# Altium PCB Science_Board_PCB.PcbDoc (part 1 of 2)
Units mil, origin at the board's own origin, x right, y up, seen from the top; angles counter-clockwise.
Board outline 6000 x 3000 mil, 4 copper layers (Top Layer, Mid Layer 1, Mid Layer 2, Bottom Layer), stack 78.937 mil thick; 225 components, 114 nets, 687 pads, 119 vias.
Unrouted connection lines stored in the file: 2.
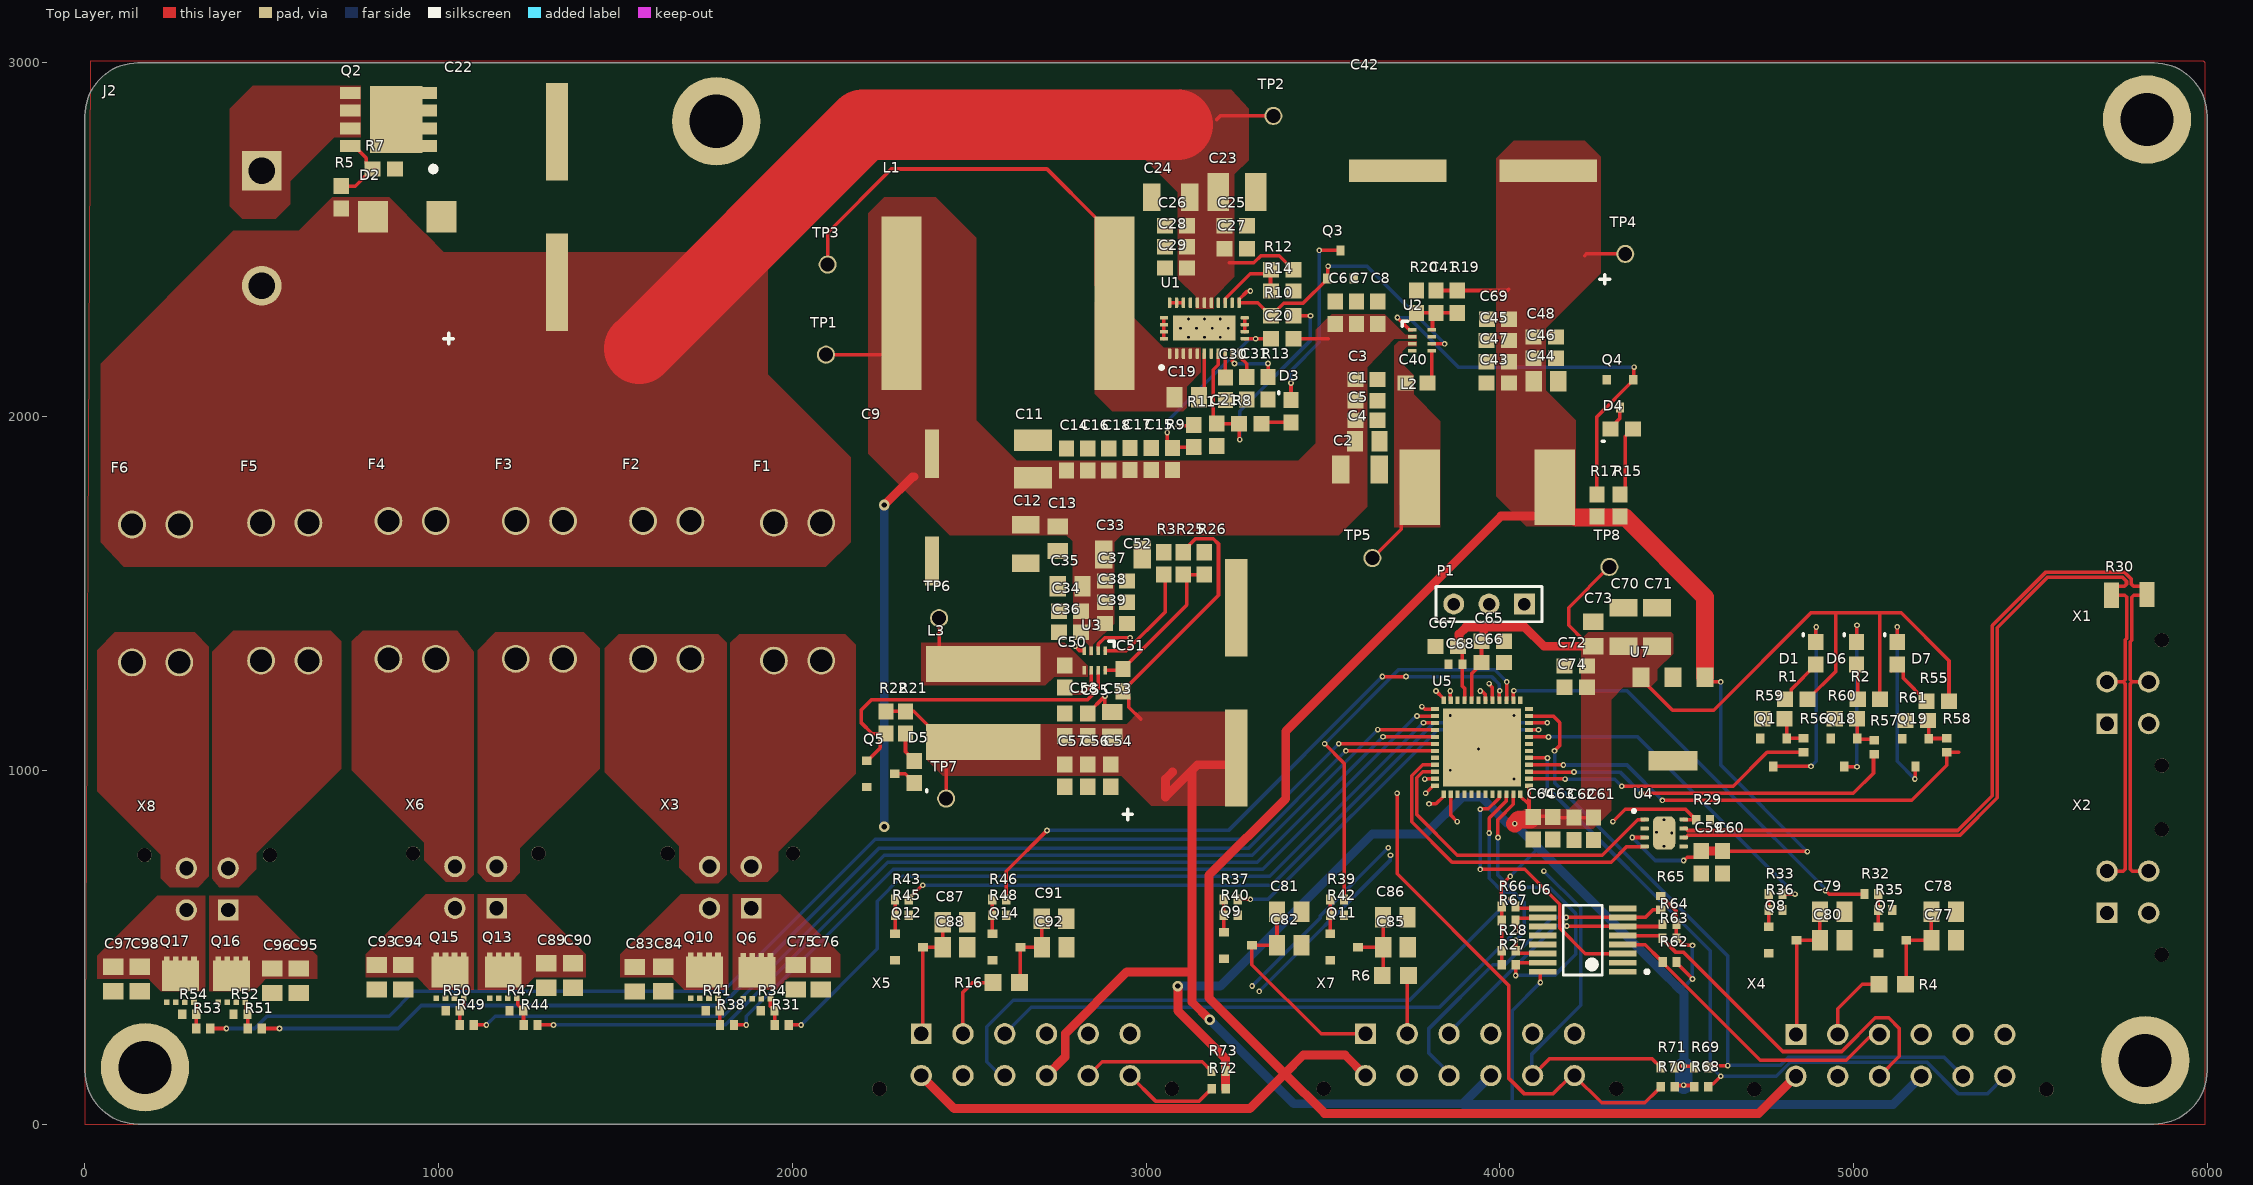
[diagram p0: Top Layer view]
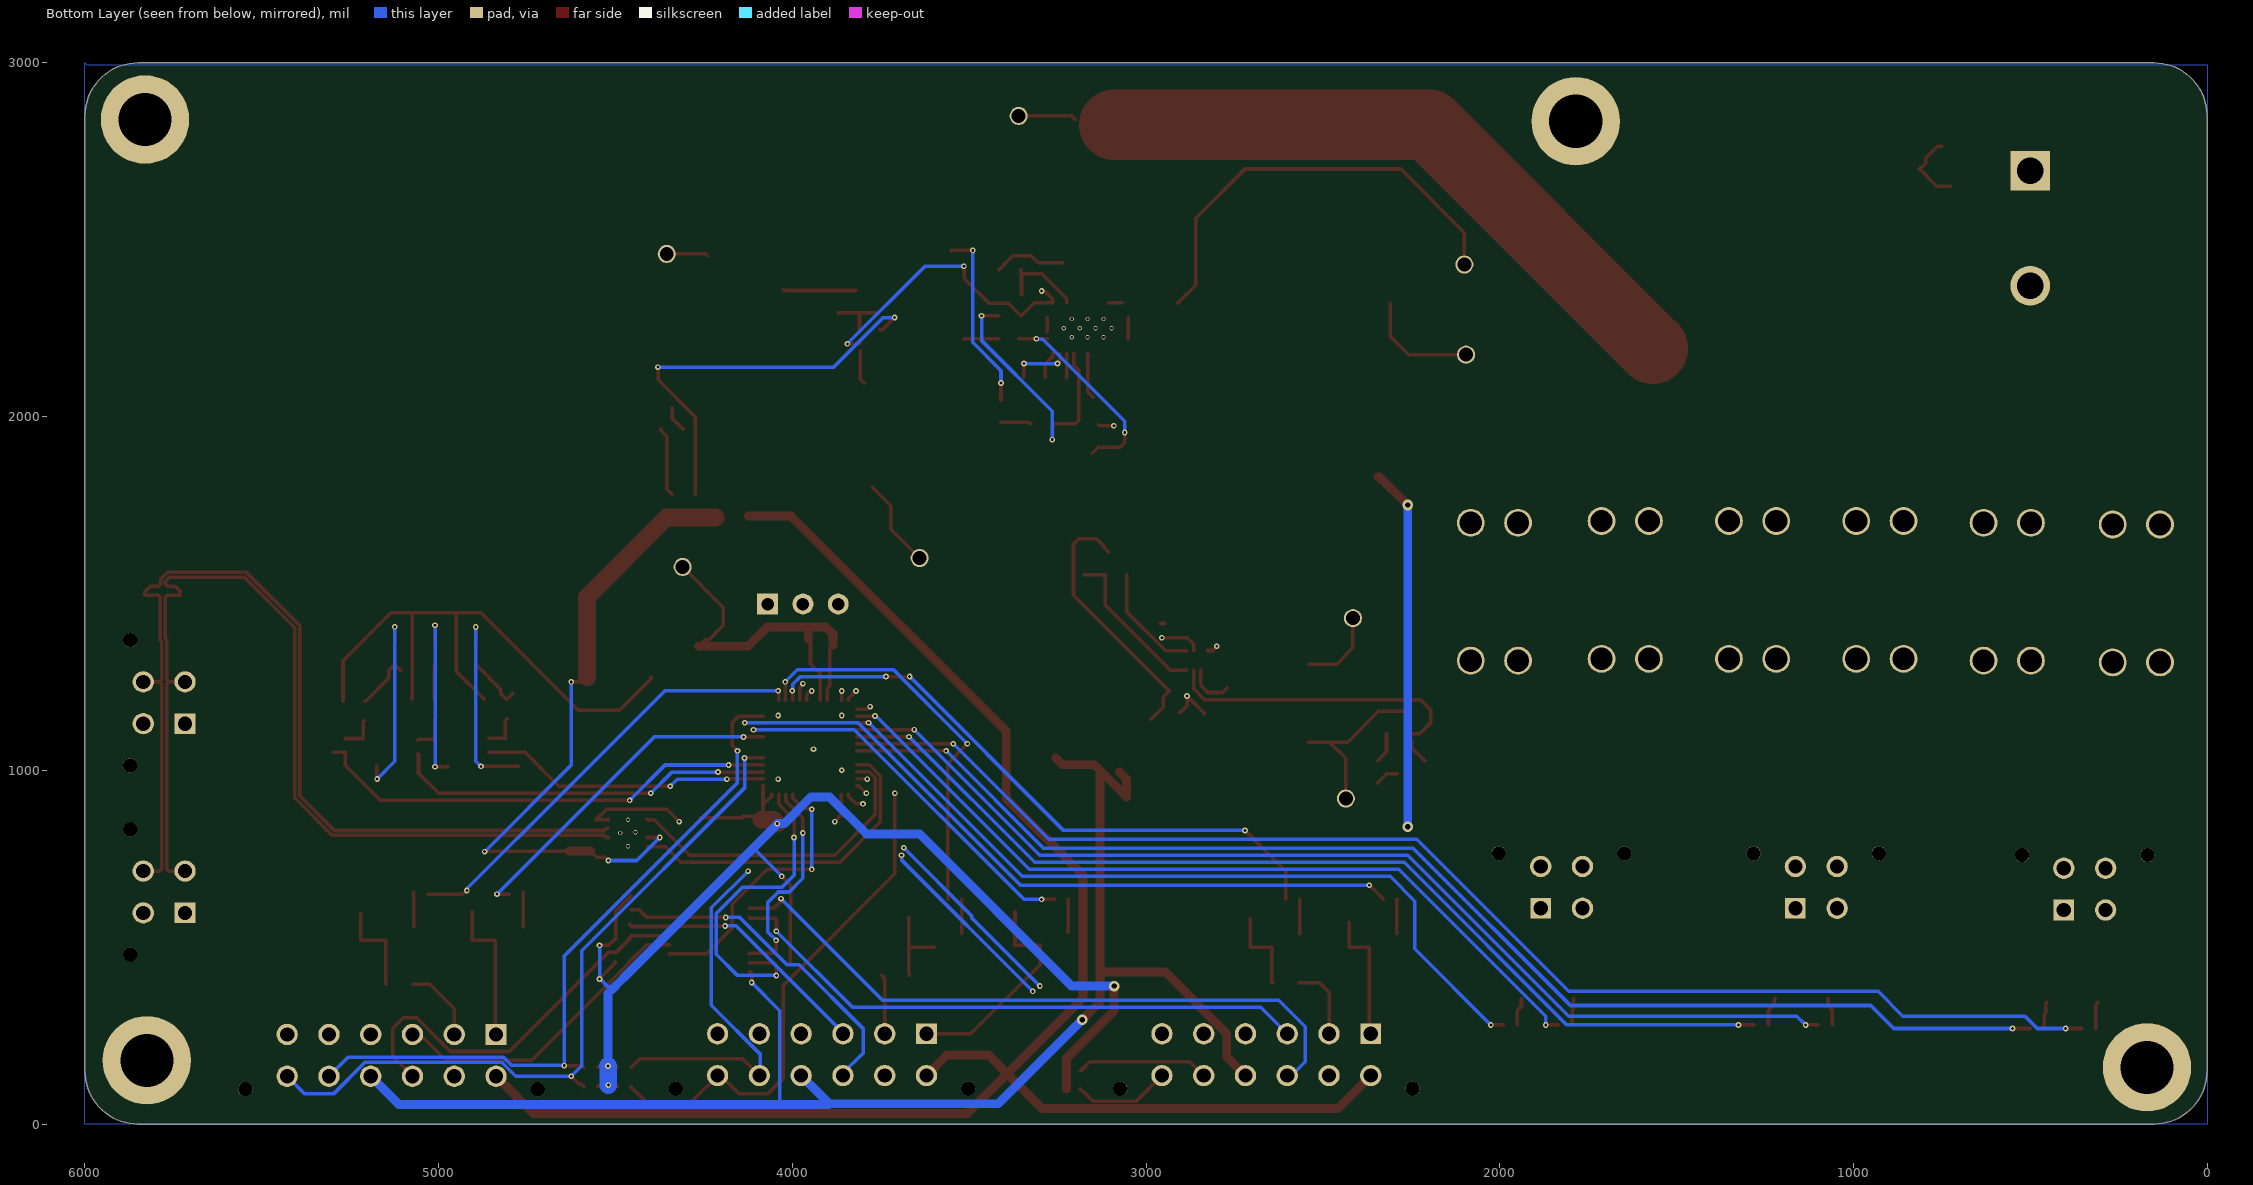
[diagram p1: Bottom Layer view, seen from below]
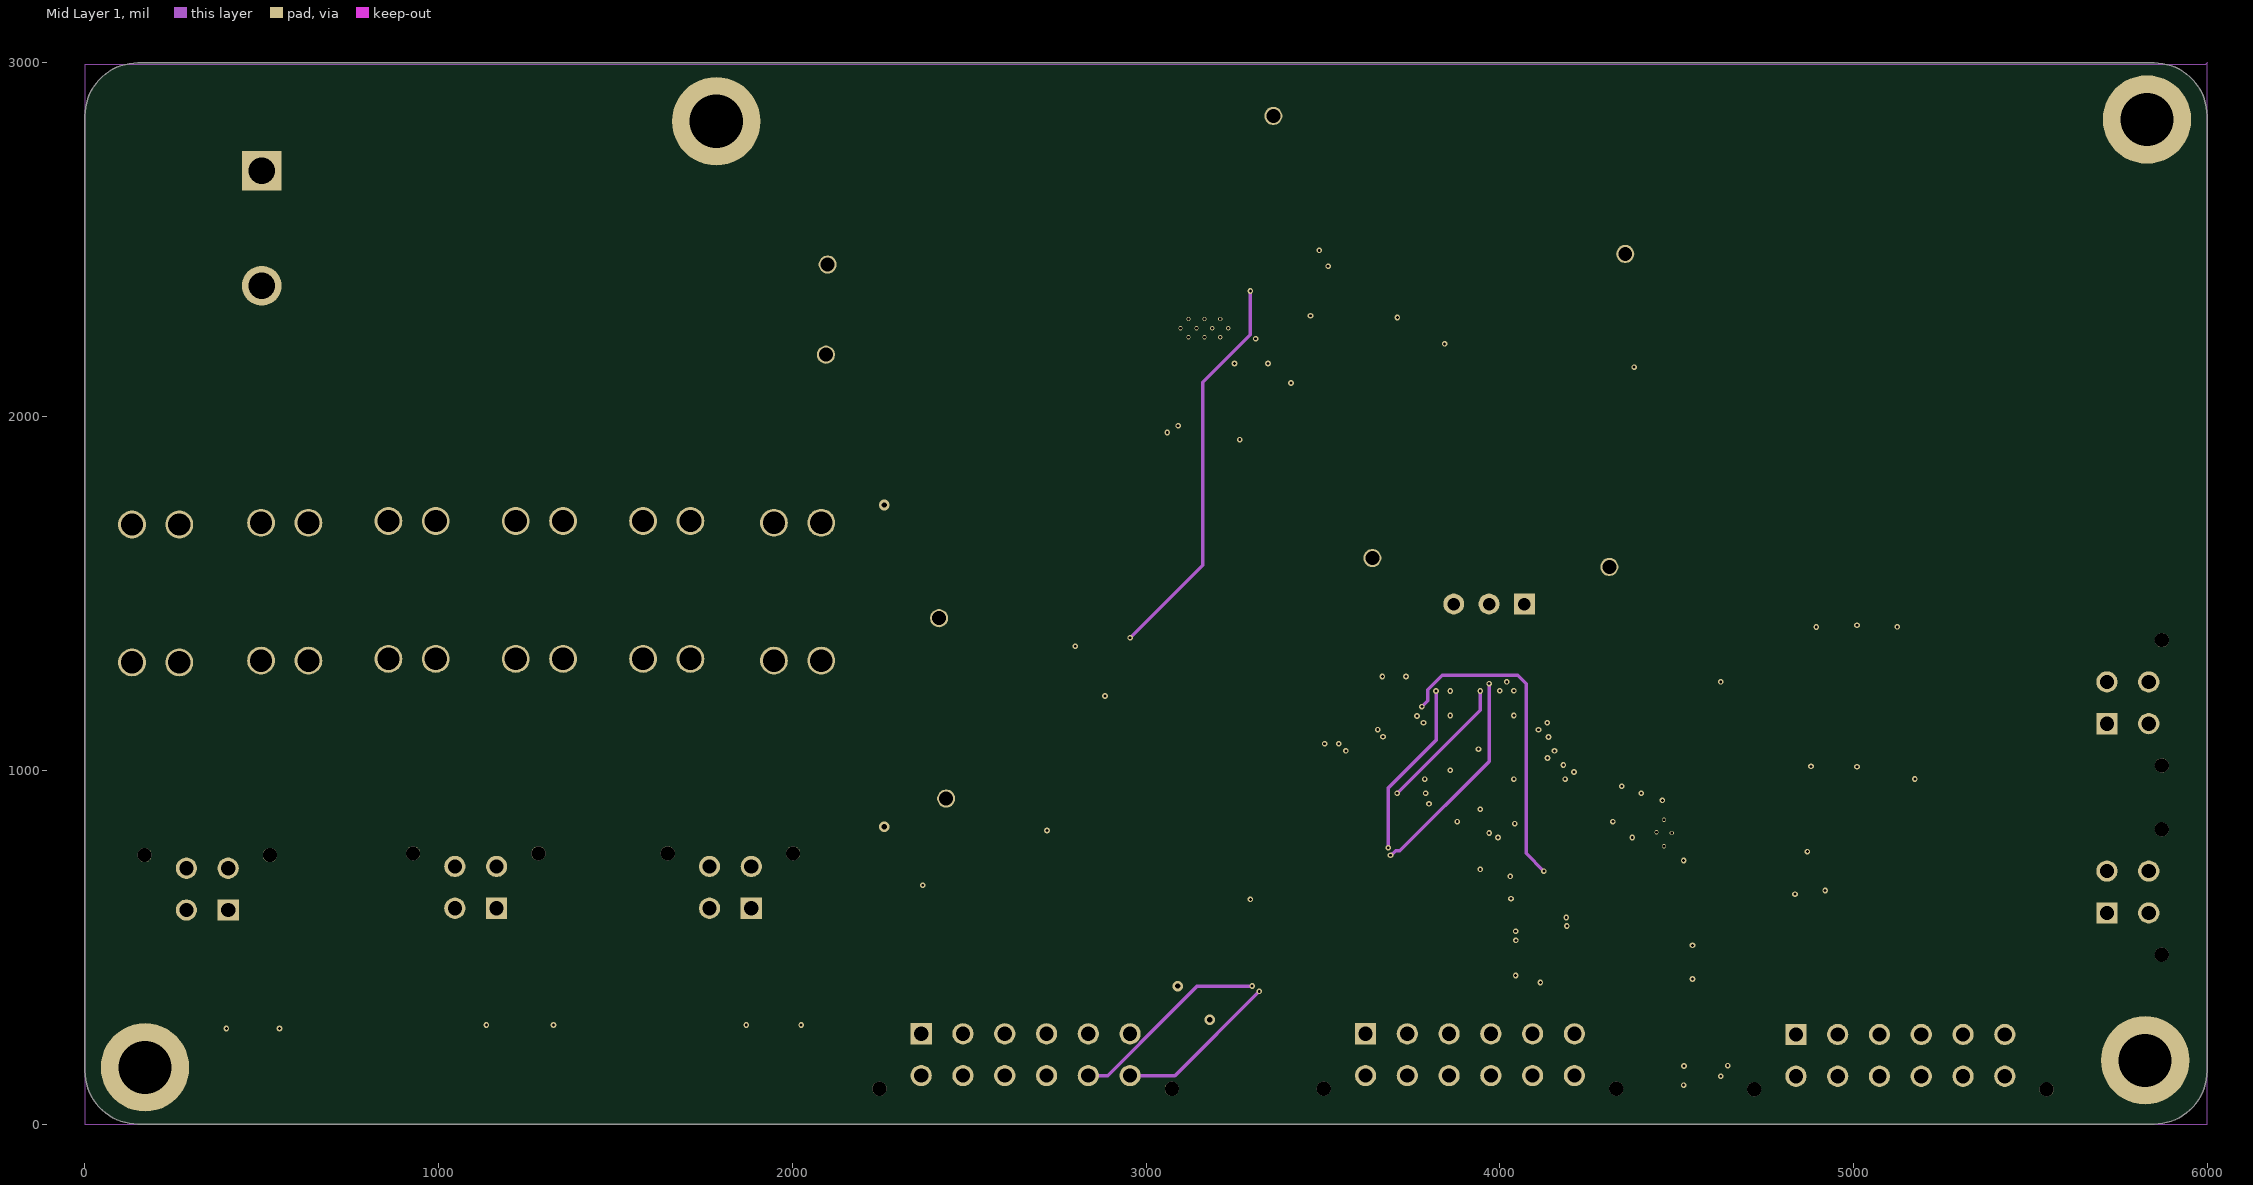
[diagram p2: Mid Layer 1]
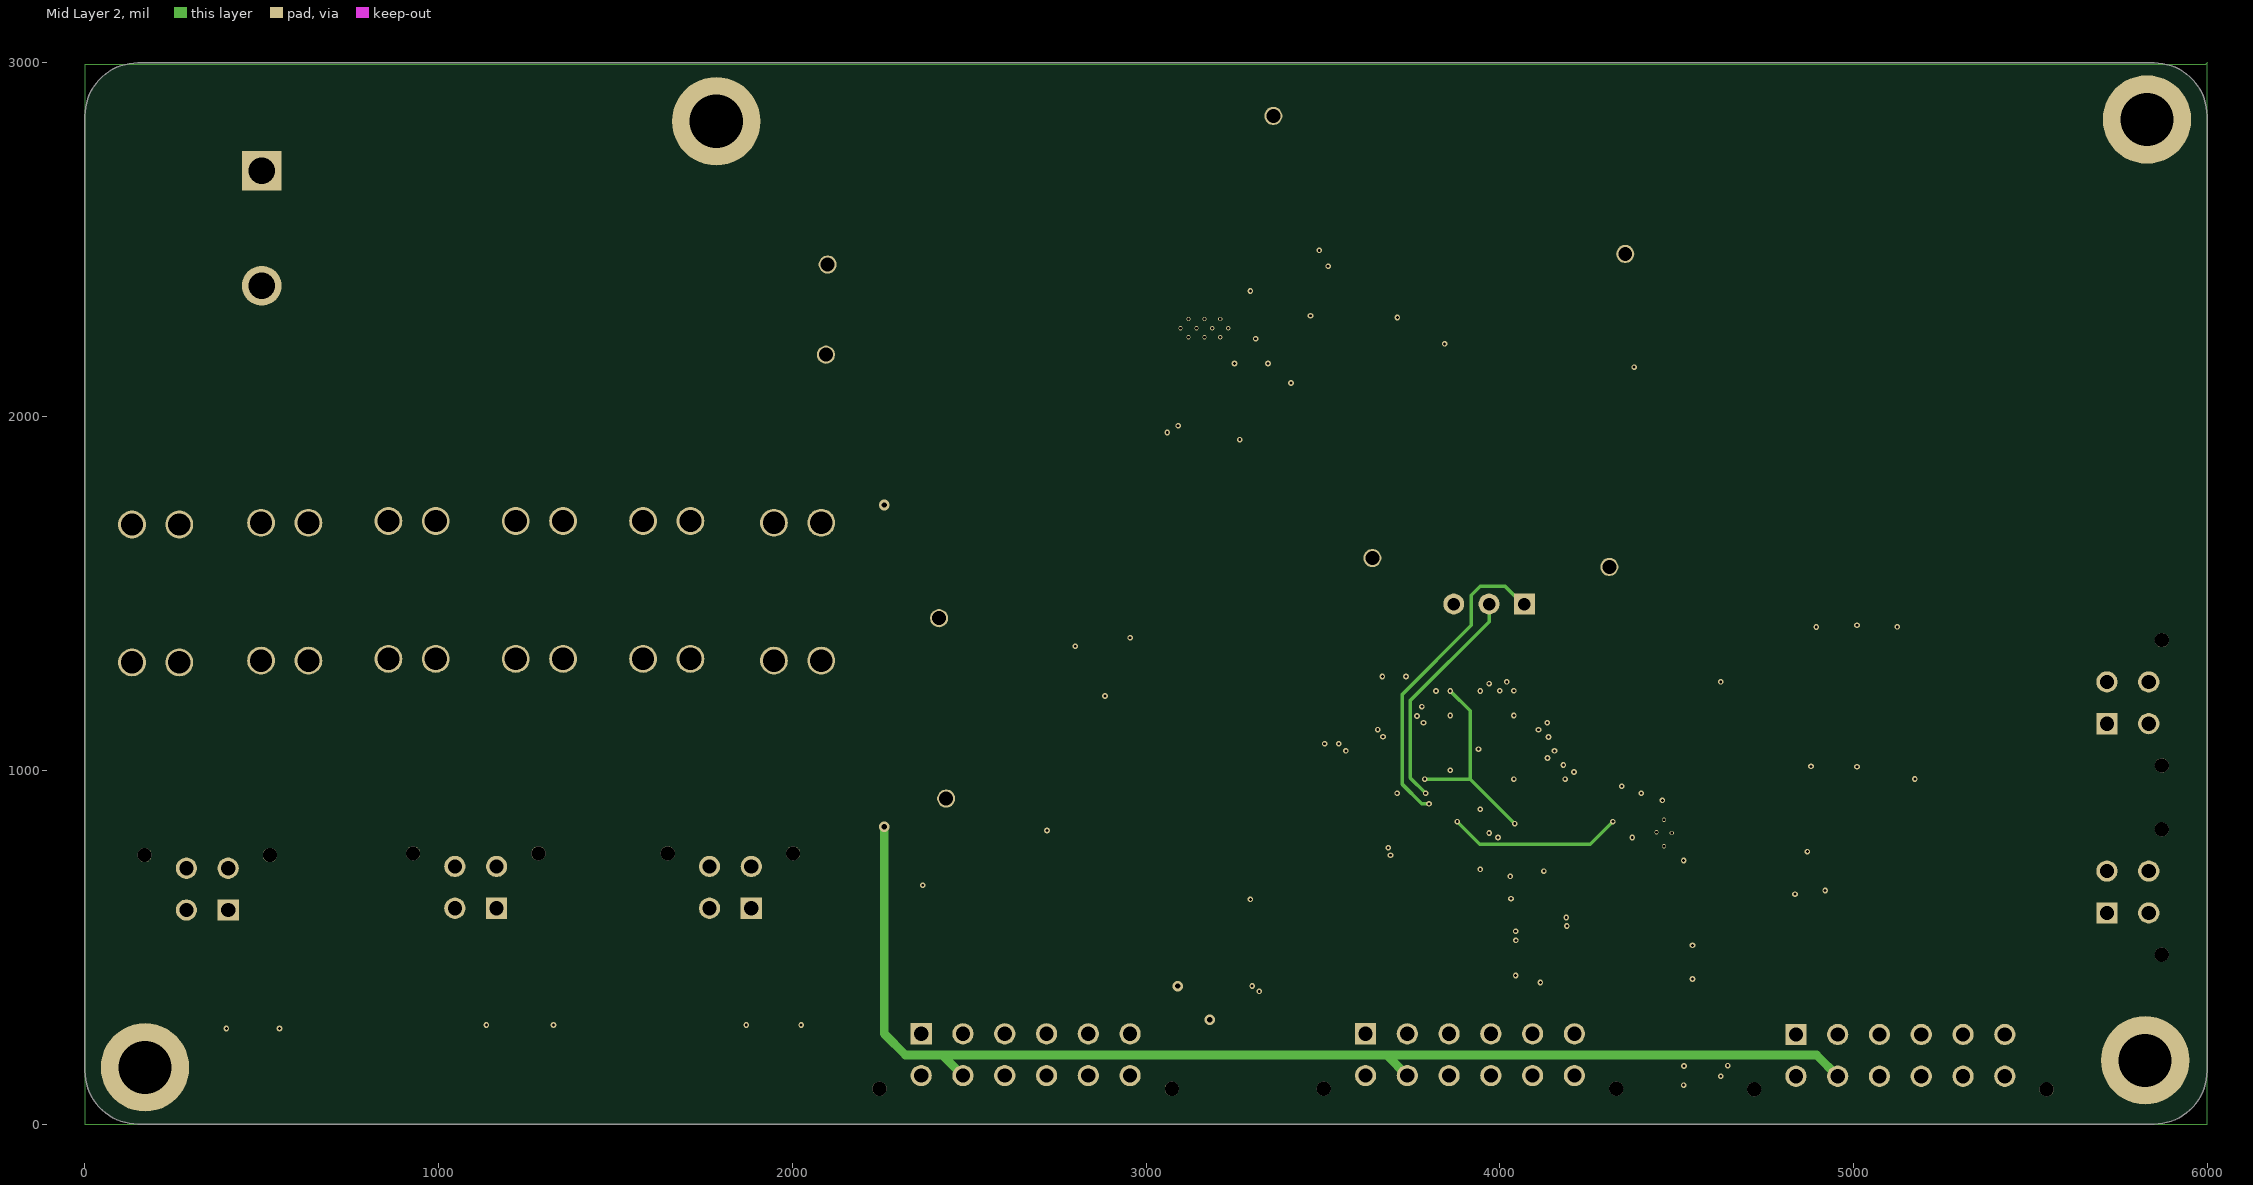
[diagram p3: Mid Layer 2]

## Layer stack, top to bottom
Top Solder: solder mask 0.5, Solder Resist, Dk 3.8
Top Layer: signal copper 1.378
Dielectric 1: prepreg 7.874, 7628, Dk 4.6
Mid Layer 1: signal copper 1.378
Core: core 57.6772, FR-4, Dk 4.5
Mid Layer 2: signal copper 1.378
Dielectric 2: prepreg 7.874, 7628, Dk 4.6
Bottom Layer: signal copper 1.378
Bottom Solder: solder mask 0.5, Solder Resist, Dk 3.8

## Board outline
0,150 0,2850 cw(c150,2850) 150,3000 5850,3000 cw(c5850,2850) 6000,2850 6000,150 cw(c5850,150) 5850,0 150,0 cw(c150,150)

## Design rules (kind name [scope] priority, off if disabled: settings)
BoardOutlineClearance [All] p1: gap=7.87 ignorepadtopadclearanceinfootprint=FALSE
Clearance [All] p1: gap=4 ignorepadtopadclearanceinfootprint=FALSE except(5: Arc-Via Track-Via SMDPad-Via THPad-Via Via-Via Via-Fill Via-Poly Via-Region Via-Text; 9.84: Arc-Hole Track-Hole SMDPad-Hole THPad-Hole Via-Hole Fill-Hole Poly-Hole Region-Hole Text-Hole)
ComponentClearance [All] p1: gap=4 collisioncheckmode=3 verticalgap=4 showdistances=TRUE
DiffPairsRouting [All] p1: maxlimit=4 minlimit=4 mostfreqgap=4 toplayer_minwidth=4 toplayer_maxwidth=71497.94 toplayer_prefwidth=4 midlayer1_minwidth=4 midlayer1_maxwidth=71497.94 midlayer1_prefwidth=4 midlayer2_minwidth=4 midlayer2_maxwidth=71497.94 midlayer2_prefwidth=4 bottomlayer_minwidth=4 bottomlayer_maxwidth=71497.94 bottomlayer_prefwidth=4 maxuncoupledlength=500
Height [All] p1: minheight=0 maxheight=71497.94 prefheight=500
HoleSize [All] p1: absolutevalues=TRUE maxlimit=248.03 minlimit=7.87 maxpercent=80.000 minpercent=20.000
HoleToHoleClearance [All] p1: gap=9.84 allowstackedmicrovias=FALSE
MinimumAnnularRing [All] p1: minimumring=3
MinimumSolderMaskSliver [All] p1: minsoldermaskwidth=0
PlaneClearance [All] p1: clearance=4
PlaneConnect PlaneConnectPowerPads [InPadClass('PowerPads')] p1: planeconnectstyle=Direct reliefexpansion=20 reliefentries=4 reliefconductorwidth=10 reliefairgap=10
PlaneConnect [All] p2: pad.planeconnectstyle=Relief pad.reliefexpansion=11.81 pad.reliefentries=4 pad.reliefconductorwidth=4 pad.reliefairgap=4 via.planeconnectstyle=Direct via.reliefexpansion=11.81 via.reliefentries=4 via.reliefconductorwidth=5 via.reliefairgap=5
PolygonConnect PolygonConnectPowerPads [All vs (InPadClass('PowerPads'))] p1: connectstyle=Direct reliefconductorwidth=10 reliefentries=4 polygonreliefangle="90 Angle" airgapwidth=10
PolygonConnect [All] p2: connectstyle=Direct reliefconductorwidth=4 reliefentries=4 polygonreliefangle="90 Angle" airgapwidth=4
RoutingVias [All] p1: holewidth=7.87 width=17.72 viastyle="Through Hole" minholewidth=7.87 minwidth=17.72 maxholewidth=248.03 maxwidth=257.87
SilkToSilkClearance [All] p1: silktosilkclearance=0
SilkToSolderMaskClearance [IsPad] p1: minsilkscreentomaskgap=4 clearancetoexposedcopper=TRUE
SolderMaskExpansion [All] p1: expansion=2.95 istentingtop=FALSE
Width [All] p1: maxlimit=71497.94 minlimit=4 preferedwidth=4
20 further rules are at their usual default settings.

## Classes and differential pairs
component class MOSFETS: C75 C76 C77 C78 C79 C80 C81 C82 C83 C84 C85 C86 C87 C88 C89 C90 C91 C92 C93 C94 C95 C96 C97 C98 F1 F2 F3 F4 F5 F6 Q6 Q7 Q8 Q9 Q10 Q11 Q12 Q13 Q14 Q15 Q16 Q17 R4 R6 R16 R31 R32 R33 R34 R35 R36 R37 R38 R39 R40 R41 R42 R43 R44 R45 R46 R47 R48 R49 R50 R51 R52 R53 R54 X3 X4 X5 X6 X7 X8
component class MCU_Sensors_CAN: C59 C60 C61 C62 C63 C64 C65 C66 C67 C68 D1 D6 D7 P1 Q1 Q18 Q19 R1 R2 R27 R28 R29 R30 R55 R56 R57 R58 R59 R60 R61 R62 R63 R64 R65 R66 R67 R68 R69 R70 R71 R72 R73 U4 U5 U6 X1 X2
component class 12V_Buck: C9 C11 C12 C13 C14 C15 C16 C17 C18 C19 C20 C21 C22 C23 C24 C25 C26 C27 C28 C29 C30 C31 D2 D3 J2 L1 Q2 Q3 R5 R7 R8 R9 R10 R11 R12 R13 R14 TP1 TP2 TP3 U1
component class 5V_Buck: C33 C34 C35 C36 C37 C38 C39 C40 C41 C42 C43 C44 C45 C46 C47 C48 D4 L2 Q4 R15 R17 R19 R20 TP4 TP5 U2
component class 3v3_LDO: C69 C70 C71 C72 C73 C74 TP8 U7
component class 3v3_Buck: C1 C2 C3 C4 C5 C6 C7 C8 C50 C51 C52 C53 C54 C55 C56 C57 C58 D5 L3 Q5 R3 R21 R22 R25 R26 TP6 TP7 U3
differential pair CAN: +CAN_P -CAN_N

## Components (designator, comment, footprint, x,y, rotation, side; value= is the part's Value field where it differs from the comment)
C1 "C1608C0G2A103J080AC" CAP-0603 3623.5,2045 r0 top
C2 "CL31B106KBHNNNE" CAP-1206 3605,1850 r0 top
C3 "UMK107AB7105KA-T" CAP-0603 3623.5,2105 r0 top
C4 "KAM21KR72A474KL" CAP-0805 3625.35,1930 r180 top
C5 "C1608C0G2A103J080AC" CAP-0603 3623.5,1990 r0 top
C6 "CC0603KRX7R0BB104" CAP-0603 3535,2293.5 r90 top
C7 "C0603Y102K1RAC7867" CAP-0603 3595,2293.5 r90 top
C8 "0603N101J101CT" CAP-0603 3655,2293.5 r270 top
C9 "50TZV220M10X10.5" ELEC-220U-0003 2395,1743.43 r180 top
C11 "C3225X7R1N106K250AC" CAP-1210 2680,1880 r90 top
C12 "CL31B105KCHNNNE" "CAP-1206 - duplicate" 2660,1645 r270 top
C13 "KAM21KR72A474KL" CAP-0805 2750,1655 r270 top
C14 "CC0603KRX7R0BB104" CAP-0603 2775,1878.5 r90 top
C15 "C1608C0G2A103J080AC" CAP-0603 3015,1880 r90 top
C16 "C0603Y102K1RAC7867" CAP-0603 2835,1878.5 r90 top
C17 "0603N101J101CT" CAP-0603 2955,1880 r90 top
C18 "0603N100J500CT" CAP-0603 2895,1878.5 r90 top
C19 "KAM21KR72A474KL" CAP-0805 3115,2055 r0 top
C20 "885012006087" CAP-0603 3385,2220 r180 top
C21 "UMK107BBJ225KA-T" CAP-0603 3200,1948.5 r270 top
C22 "100SEV100M12.5X16" ELEC-100U-0001 1335,2592.6 r180 top
C23 "C3225X7R1N106K250AC" CAP-1210 3257.2,2635 r0 top
C24 "CL31B105KCHNNNE" "CAP-1206 - duplicate" 3075,2620 r180 top
C25 "CC0603KRX7R0BB104" CAP-0603 3253.5,2540 r0 top
C26 "C1608C0G2A103J080AC" CAP-0603 3084.65,2539.39 r180 top
C27 "C0603Y102K1RAC7867" CAP-0603 3253.5,2475 r0 top
C28 "0603N101J101CT" CAP-0603 3085,2480 r180 top
C29 "0603N100J500CT" CAP-0603 3085,2420 r180 top
C30 "UMK107AB7105KA-T" CAP-0603 3225,2078.5 r270 top
C31 "CC0603KRX7R9BB333" CAP-0603 3285,2080 r270 top
C33 "CL31B106KBHNNNE" CAP-1206 2935,1610 r0 top
C34 "UMK107AB7105KA-T" CAP-0603 2785,1450 r180 top
C35 "KAM21KR72A474KL" CAP-0805 2785.35,1520 r180 top
C36 "C1608C0G2A103J080AC" CAP-0603 2785,1390 r180 top
C37 "CC0603KRX7R0BB104" CAP-0603 2915,1535 r0 top
C38 "C0603Y102K1RAC7867" CAP-0603 2915,1475 r0 top
C39 "0603N101J101CT" CAP-0603 2915,1415 r0 top
C40 "CC0603KRX7R0BB104" CAP-0603 3765,2095 r180 top
C41 "7447798111" CAP-0603 3820,2325 r270 top
C42 "100SEV100M12.5X16" ELEC-100U-0001 3925,2695 r270 top
C43 "7447798111" CAP-0603 3994.45,2095 r180 top
C44 "KAM21KR72A474KL" CAP-0805 4130.94,2100 r0 top
C45 "C0603Y102K1RAC7867" CAP-0603 3994.45,2215 r180 top
C46 "C1608C0G2A103J080AC" CAP-0603 4127.44,2165 r0 top
C47 "CC0603KRX7R0BB104" CAP-0603 3994.45,2155 r180 top
C48 "0603N101J101CT" CAP-0603 4127.44,2225 r0 top
C50 "CC0603KRX7R0BB104" CAP-0603 2770,1265 r90 top
C51 "7447798111" CAP-0603 2935,1255 r90 top
C52 "100SEV100M12.5X16" ELEC-100U-0001 3255,1247.4 r180 top
C53 "KAM21KR72A474KL" CAP-0805 2905,1130 r90 top
C54 "C0603Y102K1RAC7867" CAP-0603 2900,985 r270 top
C55 "C1608C0G2A103J080AC" CAP-0603 2835,1128.5 r90 top
C56 "CC0603KRX7R0BB104" CAP-0603 2835,985 r270 top
C57 "0603N101J101CT" CAP-0603 2770,985 r270 top
C58 "7447798111" CAP-0603 2770,1128.5 r90 top
C59 "TMK107BBJ475KA-T" CAP-0603 4570,740 r270 top
C60 "CC0603KRX7R0BB104" CAP-0603 4630,740 r270 top
C61 "TMK107BBJ475KA-T" CAP-0603 4265,835 r270 top
C62 "CC0603KRX7R0BB104" CAP-0603 4210,835 r270 top
C63 "CC0603KRX7R0BB104" CAP-0603 4150,836.5 r270 top
C64 "CC0603KRX7R0BB104" CAP-0603 4095,836.5 r270 top
C65 "UMK107AB7105KA-T" CAP-0603 3980,1365 r0 top
C66 "CC0603KRX7R0BB104" CAP-0603 3980,1305 r0 top
C67 "UMK107AB7105KA-T" CAP-0603 3850,1350 r180 top
C68 "CC0402KRX7R0BB103" CAP-0402 3875,1300 r180 top
C69 "CGA3E3X7R1H334K080AB" CAP-0603 3995,2275 r180 top
C70 "CL31B106KBHNNNE" CAP-1206 4350,1405 r90 top
C71 "CL31B106KBHNNNE" CAP-1206 4445,1405 r90 top
C72 "UMK107AB7105KA-T" CAP-0603 4215,1295 r180 top
C73 "KAM21KR72A474KL" CAP-0805 4265,1385.35 r270 top
C74 "CC0603KRX7R0BB104" CAP-0603 4215,1235 r180 top
C75 "CL21A106KOQNNNE" CAP-0805 2010,415 r270 top
C76 "CL21A106KOQNNNE" CAP-0805 2080,415 r270 top
C77 "CL21A106KOQNNNE" CAP-0805 5255,520 r0 top
C78 "CL21A106KOQNNNE" CAP-0805 5255,600 r0 top
C79 "CL21A106KOQNNNE" CAP-0805 4940,600 r0 top
C80 "CL21A106KOQNNNE" CAP-0805 4940,520 r0 top
C81 "CL21A106KOQNNNE" CAP-0805 3405,600 r0 top
C82 "CL21A106KOQNNNE" CAP-0805 3405,505 r0 top
C83 "CL21A106KOQNNNE" CAP-0805 1555,409.65 r270 top
C84 "CL21A106KOQNNNE" CAP-0805 1635,410 r270 top
C85 "CL21A106KOQNNNE" CAP-0805 3705.35,500 r0 top
C86 "CL21A106KOQNNNE" CAP-0805 3705,585 r0 top
C87 "CL21A106KOQNNNE" CAP-0805 2460,570 r0 top
C88 "CL21A106KOQNNNE" CAP-0805 2460,500 r0 top
C89 "CL21A106KOQNNNE" CAP-0805 1305,420 r270 top
C90 "CL21A106KOQNNNE" CAP-0805 1380,420 r270 top
C91 "CL21A106KOQNNNE" CAP-0805 2740,580 r0 top
C92 "CL21A106KOQNNNE" CAP-0805 2740.35,500 r0 top
C93 "CL21A106KOQNNNE" CAP-0805 825,415 r270 top
C94 "CL21A106KOQNNNE" CAP-0805 900,415 r270 top
C95 "CL21A106KOQNNNE" CAP-0805 605,405 r270 top
C96 "CL21A106KOQNNNE" CAP-0805 530,405 r270 top
C97 "CL21A106KOQNNNE" CAP-0805 80,410 r270 top
C98 "CL21A106KOQNNNE" CAP-0805 155,410 r270 top
D1 "150060AS75000" LED-0603 4893.8,1330.57 r90 top
D2 "SMBJE43CAH" "DO-214AA (SMBJ)" 910.12,2565 r0 top
D3 "150060AS75000" LED-0603 3410,2015 r90 top
D4 "150060AS75000" LED-0603 4345,1965 r180 top
D5 "150060AS75000" LED-0603 2345,995 r270 top
D6 "150060AS75000" LED-0603 5008.8,1330.57 r90 top
D7 "150060AS75000" LED-0603 5123.8,1330.57 r90 top
F1 "3568" FUSE-ATM-0001 2015,1505 r270 top
F2 "3568" FUSE-ATM-0001 1645,1510 r270 top
F3 "3568" FUSE-ATM-0001 1285,1510 r270 top
F4 "3568" FUSE-ATM-0001 925,1510 r270 top
F5 "3568" FUSE-ATM-0001 565,1505 r270 top
F6 "3568" FUSE-ATM-0001 200,1500 r270 top
J2 "1546927-2" CONN-1546927-2 500,2532.5 r0 top
L1 "IHLP6767GZER8R2M01" PWRIND-8.2U-0002 2610,2320 r180 top
L2 "SRR1240-3R3Y" PWRIND-3.3U-0003 3965,1800 r0 top
L3 "SRN8040-1R0Y" PWRIND-6.8U-0001 2540,1190 r270 top
P1 "Header 3" HDR1X3 4070,1470 r180 top
Q1 "T2N7002AK,LM" NMOS-SOT23-3 4773.8,1050.37 r180 top
Q2 "TPH7R006PL,L1Q" NMOS-8PowerVDFN 970,2765 r90 top
Q3 "T2N7002AK,LM" NMOS-SOT23-3 3550,2430 r0 top
Q4 "T2N7002AK,LM" NMOS-SOT23-3 4340,2065 r180 top
Q5 "T2N7002AK,LM" NMOS-SOT23-3 2250,990 r270 top
Q6 "TPN11006PL,LQ" NMOS-8TSON 1900,415 r0 top
Q7 "YJL3404A" NMOS-SOT23-3 5110,520 r270 top
Q8 "YJL3404A" NMOS-SOT23-3 4800,520 r270 top
Q9 "YJL3404A" NMOS-SOT23-3 3260,505 r270 top
Q10 "TPN11006PL,LQ" NMOS-8TSON 1751.61,416.02 r0 top
Q11 "YJL3404A" NMOS-SOT23-3 3560,500 r270 top
Q12 "YJL3404A" NMOS-SOT23-3 2330,500 r270 top
Q13 "TPN11006PL,LQ" NMOS-8TSON 1182.8,416.02 r0 top
Q14 "YJL3404A" NMOS-SOT23-3 2605.63,500 r270 top
Q15 "TPN11006PL,LQ" NMOS-8TSON 1032.2,416.02 r0 top
Q16 "TPN11006PL,LQ" NMOS-8TSON 415,405 r0 top
Q17 "TPN11006PL,LQ" NMOS-8TSON 270,405 r0 top
Q18 "T2N7002AK,LM" NMOS-SOT23-3 4973.8,1050.37 r180 top
Q19 "T2N7002AK,LM" NMOS-SOT23-3 5175.49,1050.18 r180 top
R1 "AC0603FR-10100RL" RES-0603 4838.8,1200.57 r180 top
R2 "AC0603FR-10100RL" RES-0603 5043.8,1200.57 r180 top
R3 "RC0603FR-079K09L" RES-0603 3050,1585 r90 top
R4 "ERJ-P06J121V" RES-0805 5110,395 r180 top
R5 "ERJ-3EKF2003V" RES-0603 725,2620 r90 top
R6 "ERJ-P06J121V" RES-0805 3705,420 r0 top
R7 "RC0603FR-07100KL" RES-0603 845,2700 r180 top
R8 "AC0603FR-10100RL" RES-0603 3295,1980 r0 top
R9 "RC0603FR-07100KL" RES-0603 3075,1880 r90 top
R10 "RC0603FR-0710KP" RES-0603 3385,2285 r0 top
R11 "RC0603FR-079K09L" RES-0603 3135,1945 r90 top
R12 "RC0603FR-072M15L" RES-0603 3385,2415 r0 top
R13 "RC0603FR-0776K8L" RES-0603 3345,2080 r90 top
R14 "RC0603FR-07100KL" RES-0603 3385,2355 r0 top
R15 "CRGCQ0603J220R" RES-0603 4340,1748.5 r90 top
R16 "ERJ-P06J121V" RES-0805 2605,400 r180 top
R17 "RC0603FR-0710KP" RES-0603 4275,1748.5 r270 top
R19 "RC0603FR-0773K2L" RES-0603 3880,2325 r270 top
R20 "RC0603FR-0710KP" RES-0603 3765,2325 r90 top
R21 "AC0603FR-10100RL" RES-0603 2320,1135 r90 top
R22 "AF0603FR-074K7L" RES-0603 2265,1135 r90 top
R25 "RC0603FR-0730K9L" RES-0603 3105,1585 r270 top
R26 "RC0603FR-0710KP" RES-0603 3165,1585 r90 top
R27 "RC0402FR-074K7P" RES-0402 4025.32,450 r180 top
R28 "RC0402FR-074K7P" RES-0402 4025.32,490 r180 top
R29 "RC0402FR-074K7P" RES-0402 4575,860 r180 top
R30 "CRGH1206F120R" RES-1206 5780,1495 r0 top
R31 "ERJ2RKF33R0X" RES-0402 1970,280 r180 top
R32 "ERJ2RKF33R0X" RES-0402 5050.94,650 r0 top
R33 "ERJ2RKF33R0X" RES-0402 4780,650 r180 top
R34 "ERJ2GEJ103X" RES-0402 1930,320 r180 top
R35 "ERJ2GEJ103X" RES-0402 5090,605 r0 top
R36 "ERJ2GEJ103X" RES-0402 4780,605 r0 top
R37 "ERJ2RKF33R0X" RES-0402 3240,635 r180 top
R38 "ERJ2RKF33R0X" RES-0402 1815.32,280 r180 top
R39 "ERJ2RKF33R0X" RES-0402 3540.32,635 r180 top
R40 "ERJ2GEJ103X" RES-0402 3240,590 r0 top
R41 "ERJ2GEJ103X" RES-0402 1775,320 r180 top
R42 "ERJ2GEJ103X" RES-0402 3540.32,590 r0 top
R43 "ERJ2RKF33R0X" RES-0402 2310,635 r180 top
R44 "ERJ2RKF33R0X" RES-0402 1260,280 r180 top
R45 "ERJ2GEJ103X" RES-0402 2310,590 r0 top
R46 "ERJ2RKF33R0X" RES-0402 2585,635 r180 top
R47 "ERJ2GEJ103X" RES-0402 1220,320 r180 top
R48 "ERJ2GEJ103X" RES-0402 2585,590 r0 top
R49 "ERJ2RKF33R0X" RES-0402 1079.68,280 r180 top
R50 "ERJ2GEJ103X" RES-0402 1040,320 r180 top
R51 "ERJ2RKF33R0X" RES-0402 480.31,270 r180 top
R52 "ERJ2GEJ103X" RES-0402 440,310 r180 top
R53 "ERJ2RKF33R0X" RES-0402 334.69,270 r180 top
R54 "ERJ2GEJ103X" RES-0402 295,310 r180 top
R55 "AC0603FR-10100RL" RES-0603 5238.8,1195.57 r180 top
R56 "ERJ2RKF33R0X" RES-0402 4858.8,1070.57 r90 top
R57 "ERJ2RKF33R0X" RES-0402 5058.8,1065.57 r90 top
R58 "ERJ2RKF33R0X" RES-0402 5263.8,1070.57 r90 top
R59 "RC0603FR-0710KP" RES-0603 4773.8,1145.57 r180 top
R60 "RC0603FR-0710KP" RES-0603 4978.8,1145.57 r180 top
R61 "RC0603FR-0710KP" RES-0603 5178.8,1140.57 r180 top
R62 "RC0402FR-074K7P" RES-0402 4480.31,458.03 r0 top
R63 "RC0402FR-074K7P" RES-0402 4480,525 r0 top
R64 "RC0402FR-074K7P" RES-0402 4480,565 r0 top
R65 "RC0402FR-074K7P" RES-0402 4455,625 r90 top
R66 "RC0402FR-074K7P" RES-0402 4025,615 r180 top
R67 "RC0402FR-074K7P" RES-0402 4025,575 r180 top
R68 "ERJ2GEJ103X" RES-0402 4570,105 r180 top
R69 "ERJ2GEJ103X" RES-0402 4570,160 r180 top
R70 "ERJ2GEJ103X" RES-0402 4475,105 r0 top
R71 "ERJ2GEJ103X" RES-0402 4475,160 r0 top
R72 "ERJ2GEJ103X" RES-0402 3205.32,100 r0 top
R73 "ERJ2GEJ103X" RES-0402 3205,150 r0 top
TP1 "5003" TEST-POINT-0001 2095,2175 r0 top
TP2 "5003" TEST-POINT-0001 3360,2850 r270 top
TP3 "5003" TEST-POINT-0001 2100,2430 r270 top
TP4 "5003" TEST-POINT-0001 4355,2460 r0 top
TP5 "5003" TEST-POINT-0001 3640,1600 r0 top
TP6 "5003" TEST-POINT-0001 2415,1430 r0 top
TP7 "5003" TEST-POINT-0001 2435,920 r0 top
TP8 "5003" TEST-POINT-0001 4310,1575 r0 top
U1 "LM76005RNPR" IC-30-WQFN(6x4) 3165,2250 r90 top
U2 "TPS563212DRLR" IC-SOT583 3780,2215 r270 top
U3 "TPS62933ODRLR" IC-SOT583 2855,1310 r180 top
U4 "TCAN1042HGDRBTQ1" IC-8-VSON 4464.88,822.8 r0 top
U5 "STM32G431CBU6" MCU-UFQFPN48 3950,1064.8 r180 top
U6 "TCA9546APWR" PW0016A-IPC_A 4235,520 r180 top
U7 "UA78M33CDCYR" IC-SOT-223-4 4490,1145 r270 top
X1 "Molex 43045-0412" 43045-0412 5716.89,1190.94 r270 top
X2 "Molex 43045-0412" 43045-0412 5716.89,655.94 r270 top
X3 "Molex 43045-0412" 43045-0412 1825,610 r0 top
X4 "Molex - Micro-Fit 3.0 Series connector,  3.00mm (0.118\") pitch header, 12 positions." 43045-1212 5132.83,253.11 r180 top
X5 "Molex - Micro-Fit 3.0 Series connector,  3.00mm (0.118\") pitch header, 12 positions." 43045-1212 2659.72,255 r180 top
X6 "Molex 43045-0412" 43045-0412 1105,610 r0 top
X7 "Molex - Micro-Fit 3.0 Series connector,  3.00mm (0.118\") pitch header, 12 positions." 43045-1212 3915.94,255 r180 top
X8 "Molex 43045-0412" 43045-0412 345.94,605 r0 top

## Footprints (in the part's own frame and the unit in brackets; to place one, negate y for a bottom-side part, rotate by r counter-clockwise, add the part's x,y. Pads: shape width x height; smd on the part's side, far side on the other; paste and mask are expansions set on the pad)
43045-0412 [mm]
  round 1.02 hole 1.02 unplated: 1(-4.5,3.94) 1(4.5,3.94)
  rect 1.482x1.482 / inner rect 1.524x1.524 / far side rect 1.482x1.482 hole 1.02: P$1(1.5,0)
  round 1.53 / inner round 1.524 / far side round 1.53 hole 1.02: P$2(-1.5,0) P$3(1.5,3) P$4(-1.5,3)
  body extent -5.07,-2.45 5.08,6.32, height 10.03
43045-1212 [mm]
  round 1.02 hole 1.02 unplated: 1(-10.5,3.94) 1(10.5,3.94)
  rect 1.482x1.482 / inner rect 1.524x1.524 / far side rect 1.482x1.482 hole 1.02: P$1(7.5,0)
  round 1.53 / inner round 1.524 / far side round 1.53 hole 1.02: P$2(4.5,0) P$3(1.5,0) P$4(-1.5,0) P$5(-4.5,0) P$6(-7.5,0) P$7(7.5,3) P$8(4.5,3) P$9(1.5,3) P$10(-1.5,3) P$11(-4.5,3) P$12(-7.5,3)
CAP-0402 [mm]
  rect 0.6x0.7 smd: 1(-0.5,0) 2(0.5,0)
  body extent -0.5,-0.22 0.5,0.23, height 0.5
CAP-0603 [mm]
  rect 1.15x1.1 smd: 1(-0.8,0) 2(0.8,0)
  body extent -0.8,-0.45 0.8,0.45, height 0.8
CAP-0805 [mm]
  rect 1.16x1.47 smd: 1(-0.88,0) 2(0.88,0)
  body extent -1,-0.63 1,0.63, height 0.94
CAP-1206 [mm]
  rect 1.25x2 smd: 1(-1.375,0) 2(1.375,0)
  body extent -1.6,-0.8 1.6,0.8, height 1.5
"CAP-1206 - duplicate" [mm]
  rect 1.25x2 smd: 1(-1.248,0) 2(1.502,0)
  body extent -1.47,-0.8 1.73,0.8, height 1.5
CAP-1210 [mm]
  rect 1.53x2.72 smd: 1(-1.341,0) 2(1.341,0)
  body extent -1.6,-1.25 1.6,1.25, height 2.7
CONN-1546927-2 [mm]
  rect 2.85x2.85 hole 1.9: 1(0,4.127)
  round 2.85 hole 1.9: 2(0,-4.127)
  body extent -11.57,-8.85 4.49,8.85, height 14.99
"DO-214AA (SMBJ)" [mm]
  rect 2.16x2.26 smd: 1(-2.416,0) 2(2.484,0)
  body extent -2.72,-1.95 2.78,1.95, height 2.45
ELEC-100U-0001 [mm]
  rect 1.6x7 smd: 1(0,5.4) 2(0,-5.4)
  silkscreen extent 7.45,9.08 8.13,9.82, body extent -6.6,-7.15 6.6,7.15, height 16.56
ELEC-220U-0003 [mm]
  rect 1x3.5 smd: 1(0,-3.85) 2(0,3.85)
  body extent -5.25,-5.45 5.25,5.45, height 10.54
FUSE-ATM-0001 [mm]
  round 2 hole 1.6: 1(-4.95,-1.7) 1(-4.95,1.7) 2(4.95,-1.7) 2(4.95,1.7)
  body extent -8,-3.37 8,3.37, height 7.37
HDR1X3 [mm] "Connector; Header; 3 Position"
  rect 1.5x1.5 hole 0.9: 1(0,0)
  round 1.5 hole 0.9: 2(2.54,0) 3(5.08,0)
  silkscreen extent -1.27,-1.27 6.35,1.27
IC-8-VSON [mm]
  rrect50% 0.6x0.3 smd mask+0.07: 1(-1.4,0.975) 2(-1.4,0.325) 3(-1.4,-0.325) 4(-1.4,-0.975) 5(1.4,-0.975) 6(1.4,-0.325) 7(1.4,0.325) 8(1.4,0.975)
  rrect50% 1.6x2.4 smd: 9(0,0)
  silkscreen extent -2.26,1.48 -2.08,1.67, body extent -1.5,-1.5 1.5,1.5, height 1
IC-30-WQFN(6x4) [mm] "30 pin WQFN with exposed pad"
  rrect50% 0.75x0.25 smd mask+0.07: 1(-1.825,2.5) 2(-1.825,2) 3(-1.825,1.5) 4(-1.825,1) 5(-1.825,0.5) 6(-1.825,0) 7(-1.825,-0.5) 8(-1.825,-1) 9(-1.825,-1.5) 10(-1.825,-2) 11(-1.825,-2.5) 16(1.825,-2.5) 17(1.825,-2) 18(1.825,-1.5) 19(1.825,-1) 20(1.825,-0.5) 21(1.825,0) 22(1.825,0.5) 23(1.825,1) 24(1.825,1.5) 25(1.825,2) 26(1.825,2.5)
  rrect50% 0.25x0.6 smd mask+0.07: 12(-0.75,-2.9) 13(-0.25,-2.9) 14(0.25,-2.9) 15(0.75,-2.9) 27(0.75,2.9) 28(0.25,2.9) 29(-0.25,2.9) 30(-0.75,2.9)
  rect 1.8x4.5 smd: 31(0,0)
  silkscreen extent -2.94,2.96 -2.71,3.19, body extent -2,-3 2,3, height 0.8
IC-SOT583 [mm]
  rect 0.25x0.6 smd: 1(-0.762,-0.7) 2(-0.262,-0.7) 3(0.238,-0.7) 4(0.738,-0.7) 5(0.738,0.7) 6(0.238,0.7) 7(-0.262,0.7) 8(-0.762,0.7)
  silkscreen extent -1.4,-1.4 -1.02,-1.02, body extent -1.11,-0.85 1.11,0.85, height 0.56
IC-SOT-223-4 [mm]
  rect 1.4x1.2 smd mask+0.07: 1(-3,2.3) 2(-3,0) 3(-3,-2.3)
  rect 1.4x3.5 smd: 2(3,0)
  body extent -3.5,-3.25 3.5,3.25, height 1.68
LED-0603 [mm]
  rect 1.15x1.1 smd: 1(-0.8,0) 2(0.8,0)
  silkscreen extent 1.27,0.89 1.4,0.89, body extent -0.8,-0.3 0.8,0.3, height 1
MCU-UFQFPN48 [mm] "STM32G431CBU6"
  rect 0.55x0.3 smd mask+0.07: 1(-3.375,2.75) 2(-3.375,2.25) 3(-3.375,1.75) 4(-3.375,1.25) 5(-3.375,0.75) 6(-3.375,0.25) 7(-3.375,-0.25) 8(-3.375,-0.75) 9(-3.375,-1.25) 10(-3.375,-1.75) 11(-3.375,-2.25) 12(-3.375,-2.75) 25(3.375,-2.75) 26(3.375,-2.25) 27(3.375,-1.75) 28(3.375,-1.25) 29(3.375,-0.75) 30(3.375,-0.25) 31(3.375,0.25) 32(3.375,0.75) 33(3.375,1.25) 34(3.375,1.75) 35(3.375,2.25) 36(3.375,2.75)
  rect 0.3x0.55 smd mask+0.07: 13(-2.75,-3.375) 14(-2.25,-3.375) 15(-1.75,-3.375) 16(-1.25,-3.375) 17(-0.75,-3.375) 18(-0.25,-3.375) 19(0.25,-3.375) 20(0.75,-3.375) 21(1.25,-3.375) 22(1.75,-3.375) 23(2.25,-3.375) 24(2.75,-3.375) 37(2.75,3.375) 38(2.25,3.375) 39(1.75,3.375) 40(1.25,3.375) 41(0.75,3.375) 42(0.25,3.375) 43(-0.25,3.375) 44(-0.75,3.375) 45(-1.25,3.375) 46(-1.75,3.375) 47(-2.25,3.375) 48(-2.75,3.375)
  rect 5.6x5.6 smd: 49(0,0)
  silkscreen extent -4.68,3.08 -4.43,3.32, body extent -3.56,-3.56 3.56,3.56, height 0.61
NMOS-8PowerVDFN [mm]
  rect 0.85x1.45 smd: 1(0,5.588) 2(1.27,5.588) 2(2.54,5.588) 2(3.81,5.588)
  rect 0.85x1.05 smd: 3(0,-0.112) 3(1.27,-0.112) 3(2.54,-0.112) 3(3.81,-0.112)
  rect 4.8x3.75 smd: 3(1.905,2.286)
  silkscreen extent -1.91,-0.64 -1.4,-0.13
NMOS-8TSON [mm]
  rect 0.4x0.4 smd: 1(0.975,-1.55) 2(-0.975,-1.55) 2(-0.325,-1.55) 2(0.325,-1.55)
  rect 0.4x0.3 smd: 3(-0.975,1.6) 3(-0.325,1.6) 3(0.325,1.6) 3(0.975,1.6)
  rect 2.65x2.2 smd: 3(0,0.35)
  body extent -1.65,-1.65 1.65,1.65, height 0.85
NMOS-SOT23-3 [mm]
  rect 0.6x0.7 smd: 1(-0.95,-1) 2(0.95,-1) 3(0,1)
  body extent -1.46,-1.18 1.46,1.19, height 1.12
PW0016A-IPC_A [mm]
  rect 1.955x0.421 smd paste+0 mask+0: 1(-2.875,2.275) 2(-2.875,1.625) 3(-2.875,0.975) 4(-2.875,0.325) 5(-2.875,-0.325) 6(-2.875,-0.975) 7(-2.875,-1.625) 8(-2.875,-2.275) 9(2.875,-2.275) 10(2.875,-1.625) 11(2.875,-0.975) 12(2.875,-0.325) 13(2.875,0.325) 14(2.875,0.975) 15(2.875,1.625) 16(2.875,2.275)
  silkscreen extent -4.73,-2.5 1.4,2.5
PWRIND-3.3U-0003 [mm]
  rect 2.9x5.4 smd: 1(-4.85,0) 2(4.85,0)
  body extent -6.4,-6.4 6.4,6.4, height 4.5
PWRIND-6.8U-0001 [mm]
  rect 2.6x8.2 smd: 1(-2.8,0) 2(2.8,0)
  body extent -4,-4 4,4, height 4
PWRIND-8.2U-0002 [mm]
  rect 2.875x12.45 smd: 1(-7.642,0) 2(7.642,0)
  body extent -8.7,-8.71 8.47,8.46, height 6.89
RES-0402 [mm]
  rect 0.6x0.7 smd: 1(-0.5,0) 2(0.5,0)
  body extent -0.5,-0.25 0.5,0.25, height 0.3
RES-0603 [mm]
  rect 1.15x1.1 smd: 1(-0.8,0) 2(0.8,0)
  body extent -0.8,-0.4 0.8,0.4, height 0.43
RES-0805 [mm]
  rect 1.2x1.2 smd: 1(-0.95,0) 2(0.95,0)
  body extent -1,-0.6 1,0.6, height 0.71
RES-1206 [mm]
  rect 1.05x1.8 smd: 1(-1.275,0) 2(1.275,0.043)
  body extent -1.6,-0.77 1.6,0.82, height 0.55
TEST-POINT-0001 [mm] "2024 miniature test point"
  round 1.3 hole 1: 1(0,0)
  body extent -1.27,-1.27 1.27,1.27, height 4.57

## Part data
C1 C5 C15 C26 C36 C46 C55: library part CAP-10N-0002, "CAP CER 10000PF 100V C0G 0603", Capacitance="10nF +/-5%", Manufacturer="TDK Corporation", Package Size=0603, Temperature Coefficient=C0G/NP0, Voltage Rating=100V, Assembled?=no, Manufacturer Part Number=C1608C0G2A103J080AC
C2 C33 C70 C71: library part CAP-10U-0001, "10 µF ±10% 50V Ceramic Capacitor X7R 1206 (3216 Metric)", Capacitance="10uF +/-20%", Manufacturer="Samsung Electro-Mechanics", Package Size=1206, Temperature Coefficient=X7R, Voltage Rating=50V, Assembled?=no, Manufacturer Part Number=CL31B106KBHNNNE
C3 C30 C34 C65 C67 C72: library part CAP-1U-0002, "1 µF ±10% 50V Ceramic Capacitor X7R 0603 (1608 Metric)", Capacitance="1 uF", Package Size=0603, Voltage=50V
C4 C13 C19 C35 C44 C53 C73: library part CAP-0.47U-0001, "0.47 µF ±10% 100V Ceramic Capacitor X7R 0805 (2012 Metric)", Capacitance="0.47 uF", Package Size=0805, Temperature Coefficient=X7R, Tolerance="+/- 10%", Voltage=100V, Assembled?=No
C6 C14 C25 C37 C40 C47 C50 C56 C60 C62 C63 C64 C66 C74: library part CAP-100N-0001, "CAP CER 0.1UF 100V X7R 0603", Capacitance="100nF +/-10%", Manufacturer=YAGEO, Package Size=0603, Temperature Coefficient=X7R, Voltage Rating=100V, Assembled?=no, Manufacturer Part Number=CC0603KRX7R0BB104
C7 C16 C27 C38 C45 C54: library part CAP-1N-0001, "1000 pF ±10% 100V Ceramic Capacitor X7R 0603 (1608 Metric)", Capacitance="1 nF +/-10%", Voltage=100V
C8 C17 C28 C39 C48 C57: library part CAP-100P-0002, "100 pF ±5% 100V Ceramic Capacitor C0G, NP0 0603 (1608 Metric)", Capacitance="100 pF", Package Size=0603, Temp Coeff=C0G/NP0, Tolerance=+/-5%, Voltage=100V
C9: library part ELEC-220U-0003, "220 µF 50 V Aluminum Electrolytic Capacitors Radial, Can - SMD 2000 Hrs @ 105°C", Capacitance="220 uF +/- 20%", Voltage Rating=50V, Size=.406inx.406in*.413in
C11 C23: library part CAP-10U-0004, "10 µF ±10% 75V Ceramic Capacitor X7R 1210 (3225 Metric)", Capacitance="10 uF +/- 10%", Voltage Rating=75V
C12 C24: library part CAP-1U-0001, "1 µF ±10% 100V Ceramic Capacitor X7R 1206 (3216 Metric)", Capacitance="1 uF +/- 10%", Voltage=100V
C18 C29: library part CAP-10P-0001, "10 pF ±5% 50V Ceramic Capacitor C0G, NP0 0603 (1608 Metric)", Capacitance="10 pF +/- 5%", Manufacturer="Walshin Technology Corporation", Package Size=0603, Temperature Coefficient="C0G, NP0", Voltage Rating=50V, Assembled?=Yes, Manufacturer Part Number=0603N100J500CT
C20: library part CAP-1P-0001, "1 pF ±0.25pF 100V Ceramic Capacitor C0G, NP0 0603 (1608 Metric)", Capacitance="1 pF", Package Size=0603, Temperature Coefficient=C0G/NP0, Tolerance="+/- 0.25 pF", Voltage=100V, Assembled?=No
C21: library part CAP-2.2U-0001, "2.2 µF ±10% 50V Ceramic Capacitor X5R 0603 (1608 Metric)", Capacitance="2.2 uF", oltage=50V
C22 C42 C52: library part ELEC-100U-0001, "100 µF 100 V Aluminum Electrolytic Capacitors Radial, Can - SMD 2000 Hrs @ 85°C", Capacitance="100 uF", Manufacturer=Rubycon, Tolerance="+/- 20%", Voltage="100 V", Assembled?=No, ESR="idk check the datasheet i couldnt find it"
C31: library part CAP-33N-0001, "0.033 µF ±10% 50V Ceramic Capacitor X7R 0603 (1608 Metric)", Capacitance="33nF +/-10%", Manufacturer=YAGEO, Package Size=0603, Temperature Coefficient=X7R, Voltage Rating=50V, Assembled?=no, Manufacturer Part Number=CC0603KRX7R9BB333
C41 C43 C51 C58: library part CAP-47P-0001, "47 pF ±5% 100V Ceramic Capacitor C0G, NP0 0603 (1608 Metric)", Capacitance="47 pF +/- 5%", Voltage Rating=100V
C59 C61: library part CAP-4.7U-0001, "4.7 µF ±10% 25V Ceramic Capacitor X5R 0603 (1608 Metric)", Capacitance="4.7uF +/-10%", Manufacturer="Taiyo Yuden", Package Size=0603, Temperature Coefficient=X5R, Voltage Rating=25V, Assembled?=no, Manufacturer Part Number=TMK107BBJ475KA-T
C68: library part CAP-10N-0001, "10000 pF ±10% 100V Ceramic Capacitor X7R 0402 (1005 Metric)", Capacitance="10nF +/-10%", Manufacturer=YAGEO, Package Size=0402, Temperature Coefficient=X7R, Voltage Rating=100V, Assembled?=no, Manufacturer Part Number=CC0402KRX7R0BB103
C69: library part CAP-0.33uF-0001, "0.33 µF ±10% 50V Ceramic Capacitor X7R 0603 (1608 Metric)", Capacitance="0.33 uF", Manufacturer="TDK Corporation", Temperature Coefficient=X7R, Tolerance="+/- 10%", Voltage=50V, Manufacturer Part Number=CGA3E3X7R1H334K080AB
C75 C76 C77 C78 C79 C80 C81 C82 C83 C84 C85 C86 C87 C88 C89 C90 C91 C92 C93 C94 C95 C96 C97 C98: library part CAP-10U-0002, "10 µF ±10% 16V Ceramic Capacitor X7R 0805 (2012 Metric)", Capacitance="10 uF", Package Size=0805, Voltage Rating=16V
D1 D3 D4 D5 D6 D7: library part LED_Amber_0001, "CAP CER 0.1UF 100V X7R 0603", Color=Amber, Current Rating=20mA, Manufacturer="Wurth Electronik", Package Size=0603, Assembled?=no, Manufacturer Part Number=150060AS75000, Vf=2V
D2: library part DIO-69.4V-0001, "69.4V Clamp 8.7A Ipp Tvs Diode Surface Mount DO-214AA (SMBJ)", Breakdown VOltage=47.8V, Package="DO-214AA (SMBJ)", Peak pulser current=8.7A, Reverse working maximum voltage=43V, Channels=Bidirectional, Vclamp=69.4V
F1 F2 F3 F4 F5 F6: library part FUSE-ATM-0001, "Fuse Holder 30 A 500V 1 Circuit Blade Through Hole", Current=30A, Voltage Rating=500V, Manufacturer Part Number=3568
J2: library part CON-2POS-0003
L1: library part PWRIND-8.2U-0002, "8.2 µH Shielded Molded Inductor 18 A 10.66mOhm Max Nonstandard", Inductance="8.2 uH", Tolerance=+/-20%, DCI=18A, DCR="10.66 mOhm", Isat=25A
L2: library part PWRIND-3.3U-0003, "3.3 µH Shielded Drum Core, Wirewound Inductor 6.8 A 15mOhm Max Nonstandard", Inductance="3.3 uH", Tolerance=30%, Assembled?=No, DCI="6.8 A", DCR="15 mOhm", Isat=6.5A
L3: library part PWRIND-1U-0001, "1 µH Semi-Shielded Drum Core, Wirewound Inductor 7.8 A 10mOhm Max Nonstandard", Inductance="1 uH", Tolerance=30%, Assembled?=No, DCI=7.8A, DCR="10 mOhm", Isat=11A
P1: "Header, 3-Pin", LatestRevisionDate=17-Jul-2002, LatestRevisionNote="Re-released for DXP Platform.", Publisher="Altium Limited"
Q1 Q3 Q4 Q5 Q18 Q19: library part NMOS-200MA-0001, "MOSFET N-CH 60V 200MA SOT23", Manufacturer=Toshiba, Package=SOT-23-3, Assembled?=no, FET type=N-Channel, Id-Continuous=200mA, Manufacturer Part Number=T2N7002AK,LM, Rds On-Max=3.9Ohm, VDS-Max=60V, Vgs-Max=20V
Q2: library part NMOS-60A-0001, "N-Channel 60 V 60A (Tc) 81W (Tc) Surface Mount 8-SOP Advance (5x5)", Drain Current=60A, Package=8-PowerVDFN, Vdss=60V, Vgs="2.5V @ 220uA", Vgs(Max)=20V
Q6 Q10 Q13 Q15 Q16 Q17: library part NMOS-26A-0001, "N-Channel 60 V 26A (Tc) 610mW (Ta), 61W (Tc) Surface Mount 8-TSON Advance (3.1x3.1)", Manufacturer=Toshiba, Package="8-TSON Advance", Assembled?=no, FET type=N-Channel, Id-Continuous=26A, Manufacturer Part Number=TPN11006PL,LQ, Rds On-Max=18.1mOhm, VDS-Max=60V, Vgs-Max=20V
Q7 Q8 Q9 Q11 Q12 Q14: library part NMOS-5.6A-0001, "N-Channel 30 V 5.6A (Ta) 1.2W (Ta) Surface Mount SOT-23", Drain Current=5.6A, Package Size=SOT23, Manufacturer Part Number=YJL3404A, Rds On="24 mOhm", Vdss=30V, Vgs(th)=2.2V
R1 R2 R8 R21 R55: library part RES-100-0002, "100 Ohms ±1% 0.1W, 1/10W Chip Resistor 0603 (1608 Metric) Automotive AEC-Q200 Thick Film", Manufacturer=YAGEO, Package Size=0603, Power Rating=1/10W, Resistance="100Ohm +/-1%", Assembled?=no, Manufacturer Part Number=AC0603FR-10100RL
R3 R11: library part RES-9.09K-0001, "9.09 kOhms ±1% 0.1W, 1/10W Chip Resistor 0603 (1608 Metric) Moisture Resistant Thick Film", Package Size=0603, Power="1/10 W", Resistance="9.09 kOhm", Tolerance=+/-1%, Assembled?=No
R4 R6 R16: library part RES-120-0001, "120 Ohms ±5% 0.5W, 1/2W Chip Resistor 0805 (2012 Metric) Automotive AEC-Q200, Pulse Withstanding Thick Film", Power="0.5 W", Resistance="120 Ohms +/-5%"
R5: library part RES-200K-0001, "200 kOhms ±1% 0.1W, 1/10W Chip Resistor 0603 (1608 Metric) Automotive AEC-Q200 Thick Film", Manufacturer="Panasonic Electronic Components", Package Size=0603, Power Rating="0.1 W", Resistance="200k +/- 1%", Assembled?=Yes, MFP=ERJ-3EKF2003V
R7 R9 R14: library part RES-100K-0003, "100 kOhms ±1% 0.1W, 1/10W Chip Resistor 0603 (1608 Metric) Moisture Resistant Thick Film", Package Size=0603, Power="1/10 W", Resistance="100 kOhm", Tolerance="+/- 1%", Assembled?=No
R10 R17 R20 R26 R59 R60 R61: library part RES-10K-0002, "RES SMD 10K OHM 1% 1/10W 0603", Manufacturer=YAGEO, Package Size=0603, Power Rating=1/10W, Resistance="10kOhm +/-1%", Assembled?=no, Manufacturer Part Number=RC0603FR-0710KP
R12: library part RES-2.15M-0001, "2.15 MOhms ±1% 0.1W, 1/10W Chip Resistor 0603 (1608 Metric) Moisture Resistant Thick Film", Package Size=0603, Power="1/10 W", Resistance="2.15 MOhm", Tolerance=+/-1%, Assembled?=No
R13: library part RES-76.8K-0001, "76.8 kOhms ±1% 0.1W, 1/10W Chip Resistor 0603 (1608 Metric) Moisture Resistant Thick Film", Manufacturer=Yageo, Package Size=0603, Power="1/10 W", Resistance="76.8 kOhm", Tolerance="+/- 1%"
R15: library part RES-220-003, "220 Ohms ±5% 0.1W, 1/10W Chip Resistor 0603 (1608 Metric) Automotive AEC-Q200, Moisture Resistant Thick Film", Package Size=0603, Power="1/10 W", Resistance="220 Ohm", Tolerance="+/- 5%"
R19: library part RES-73.2K-0001, "73.2 kOhms ±1% 0.1W, 1/10W Chip Resistor 0603 (1608 Metric) Moisture Resistant Thick Film", Package Size=0603, Power="1/10 W", Resistance="73.2 kOhm", Tolerance=1%, Assembled?=No
R22: library part RES-4.7K-0002, "RES SMD 4.7K OHM 1% 1/10W 0603", Manufacturer=YAGEO, Package Size=0603, Power Rating=1/10W, Resistance="4.7kOhm +/-1%", Assembled?=no, Manufacturer Part Number=AF0603FR-074K7L
R25: library part RES-30.9K-0001, "30.9 kOhms ±1% 0.1W, 1/10W Chip Resistor 0603 (1608 Metric) Moisture Resistant Thick Film", Package Size=0603, Power="1/10 W", Resistance="30.9 kOhm", Tolerance=1%, Assembled?=No
R27 R28 R29: library part RES-4.7K-0001, "RES SMD 4.7K OHM 1% 1/16W 0402", Manufacturer=YAGEO, Package Size=0402, Power Rating=1/16W, Resistance="4.7kOhm +/-1%", Assembled?=no, Manufacturer Part Number=RC0402FR-074K7P
R30: library part RES-120-0002, "120 Ohms ±1% 0.5W, 1/2W Chip Resistor 1206 (3216 Metric) Thick Film", Package Size=1206, Power="0.5 W", Resistance="120 Ohm", Tolerance=1%
R31 R32 R33 R37 R38 R39 R43 R44 R46 R49 R51 R53 R56 R57 R58: library part RES-33-0003-JLC, "100mW Thick Film Resistors ±100ppm/℃ ±1% -55℃~+155℃ 33Ω 0402  Chip Resistor - Surface Mount ROHS", JLC Part Number=C278594, Power="1/10 W", Resistance="33 Ohm +/- 1%", Assembled?=yes
R34 R35 R36 R40 R41 R42 R45 R47 R48 R50 R52 R54 R68 R69 R70 R71 R72 R73: library part RES-10K-0003-JLC, "100mW Thick Film Resistors 100V ±5% ±200ppm/℃ -55℃~+155℃ 10kΩ 0402  Chip Resistor - Surface Mount ROHS", JLC Part Number=C278577, Power="1/10 W", Resistance="10K Ohm +/- 5%", Assembled?=yes
R62 R63 R64 R65 R66 R67: library part RES-4.7K-0001, "RES SMD 4.7K OHM 1% 1/16W 0402", Manufacturer=YAGEO, Package Size=0402, Power Rating=1/16W, Resistance=4.7k, Assembled?=no, Manufacturer Part Number=RC0402FR-074K7P
TP1 TP2 TP3 TP4 TP5 TP6 TP7 TP8: library part TEST-POINT-0001, "Oranange PC Test Point, Miniature Phoisphor Bronze Silver Plating Through Hole Mounting Type"
U1: library part IC-BUCK-0006, "Buck Switching Regulator IC Positive Adjustable 1V 1 Output 5A 30-WFQFN Exposed Pad", Current=5A, Manufacturer="Texas Instruments", Package=30-WFQFN, Assembled?=no, Manufacturer Part Number=LM76005RNPR, Type=Buck
U2: library part IC-BUCK-0008, "Buck Switching Regulator IC Positive Adjustable 0.6V 1 Output 3A SOT-583", Current=3A, Manufacturer="Texaas Instruments", Package Size=SOT-583, Assembled?=no, Manufacturer Part Number=TPS563212DRLR, Type=Buck
U3: library part IC-BUCK-0010, "Buck Switching Regulator IC Positive Adjustable 0.8V 1 Output 3A SOT-583", Current=3A, Manufacturer="Texas Instruments", Assembled?=no, Manufacturer Part Number=TPS62933ODRLR, Type=Buck
U4: library part IC-CAN-TRANSCEIVER-0002, "1/1 Transceiver CANbus 8-VSON (3x3)", Manufacturer="Texas Instrument", CAN Capability=FD-CAN, Manufacturer Part Number=TCAN1042HGDRBTQ1
U5: library part IC-STM32G431CBU6, "128KB 1.71V~3.6V ARM-MSeries 32KB 170MHz FLASH 42 UFQFPN-48(7x7) Microcontroller Units (MCUs/MPUs/SOCs) ROHS", Package=UFQFPN-48, Assembled?=no, Manufacturer Part Number=STM32G431CBU6
U6: library part IC-MUX-0003, "Multiplexer Switch ICs I2C SWITCH 4CH", Mfr_Name="Texas Instruments", Copyright="Copyright (C) 2023 Ultra Librarian. All rights reserved.", Manufacturer_Part_Number=TCA9546APWR, RefDes=RefDes, Type=DEV
U7: library part IC-LDO-3.3V-0002, "Linear Voltage Regulator IC Positive Fixed 1 Output 500mA SOT-223-4", Current="500 mA", Package=SOT-223-4, Vin=25V, Vout=3.3V
X1 X2 X3 X6 X8: library part "Micro-Fit Molex 4 Pin 2 Row Vertical", Package=43045-0412, DeviceName=43045-0412, DeviceSetName=HEADER_POS4_?, GateName_1=G$1, LibraryName=con-molex-micro-fit-3_0_2, SymbolName_1=HEADER_POS4
X4 X5 X7: library part HEADER_POS12_?43045-1212, Package=43045-1212, DeviceName=43045-1212, DeviceSetName=HEADER_POS12_?, GateName_1=G$1, LibraryName=con-molex-micro-fit-3_0_2, SymbolName_1=HEADER_POS12

## Free pads (board coordinates)
  round 250 hole 150: ""(170,160) ""(1785,2835) ""(5825,180) ""(5830,2840)

## Via types
v1: diameter 16, hole 8, Top Layer to Bottom Layer, 101 vias
v2: diameter 11.81, hole 7.87, Top Layer to Bottom Layer, 14 vias
v3: diameter 30, hole 15, Top Layer to Bottom Layer, 4 vias

## Nets (pads, with @x,y where several pads share a name; then routed paths per layer and width w, separated by ;. In a path a pad name is that pad's centre, name@x,y a point inside that pad or via, vN(x,y) a via of type N, cw(c..) or ccw(c..) an arc to the next point about the centre after c; other vN are vias at no path point)
3V3_BUCK_MAIN: C51.1 C52.1 C53.1 C54.1 C55.1 C56.1 C57.1 C58.1 L3.2 R21.2 R22.2 R25.1 TP7.1 U6.16 X4.P$10 X5.P$10 X7.P$10 | length 5535.4
  Top Layer w10: R22.2@2265,1166.5 R21.2@2320,1166.5 2343.03,1166.5 2429.76,1079.76 L3.2@2481.18,1079.76 ; TP7.1@2435,920 2435,1033.58 L3.2@2481.18,1079.76 ; L3.2@2540,1079.76 L3.2@2481.18,1079.76 ; 2985,1145 2951.65,1178.35 2951.65,1206.85 C51.1@2935,1223.5 2935,1224.49 3205,1494.49 3205,1640 3190,1655 3140,1655 3121.65,1636.65 3121.65,1633.15 R25.1@3105,1616.5 ; X7.P$10@3975,133.08 X7.P$10@3975,136.89 ; v1(4115,400) 4115,427.15 4118.28,430.43 U6.16@4121.8,430.43
  Top Layer w25: X5.P$10@2718.78,136.89 2771.55,189.66 2771.55,255.59 2945.96,430 3130,430 ; 3075,995 3055,975 3055,925 3130,1000 ; v3(3180,295) 3130,345 3130,430 ; C52.1@3255,1034.8 3255,1034.64 3236,1015.65 3145.65,1015.65 3130,1000 ; 3130,430 3130,1000
  Bottom Layer w10: 4035,55.57 4035,320 v1(4115,400)
  Bottom Layer w25: v3(3180,295) 3417.54,57.46 3895.57,57.46 ; X7.P$10@3975,136.89 3895.57,57.46 ; X4.P$10@5191.89,135 5112.46,55.57 4035,55.57 3897.46,55.57 3895.57,57.46